# Altium PCB PCB_3U_RJ45.PCBDOC (part 1 of 2)
Units mil, origin at the board's own origin, x right, y up, seen from the top; angles counter-clockwise.
Board outline 2496.06 x 3937 mil, 4 copper layers (TopLayer, MidLayer2, Internal Plane 1, BottomLayer), stack 44.239 mil thick; 232 components, 140 nets, 824 pads, 257 vias.
Unrouted connection lines stored in the file: 421.
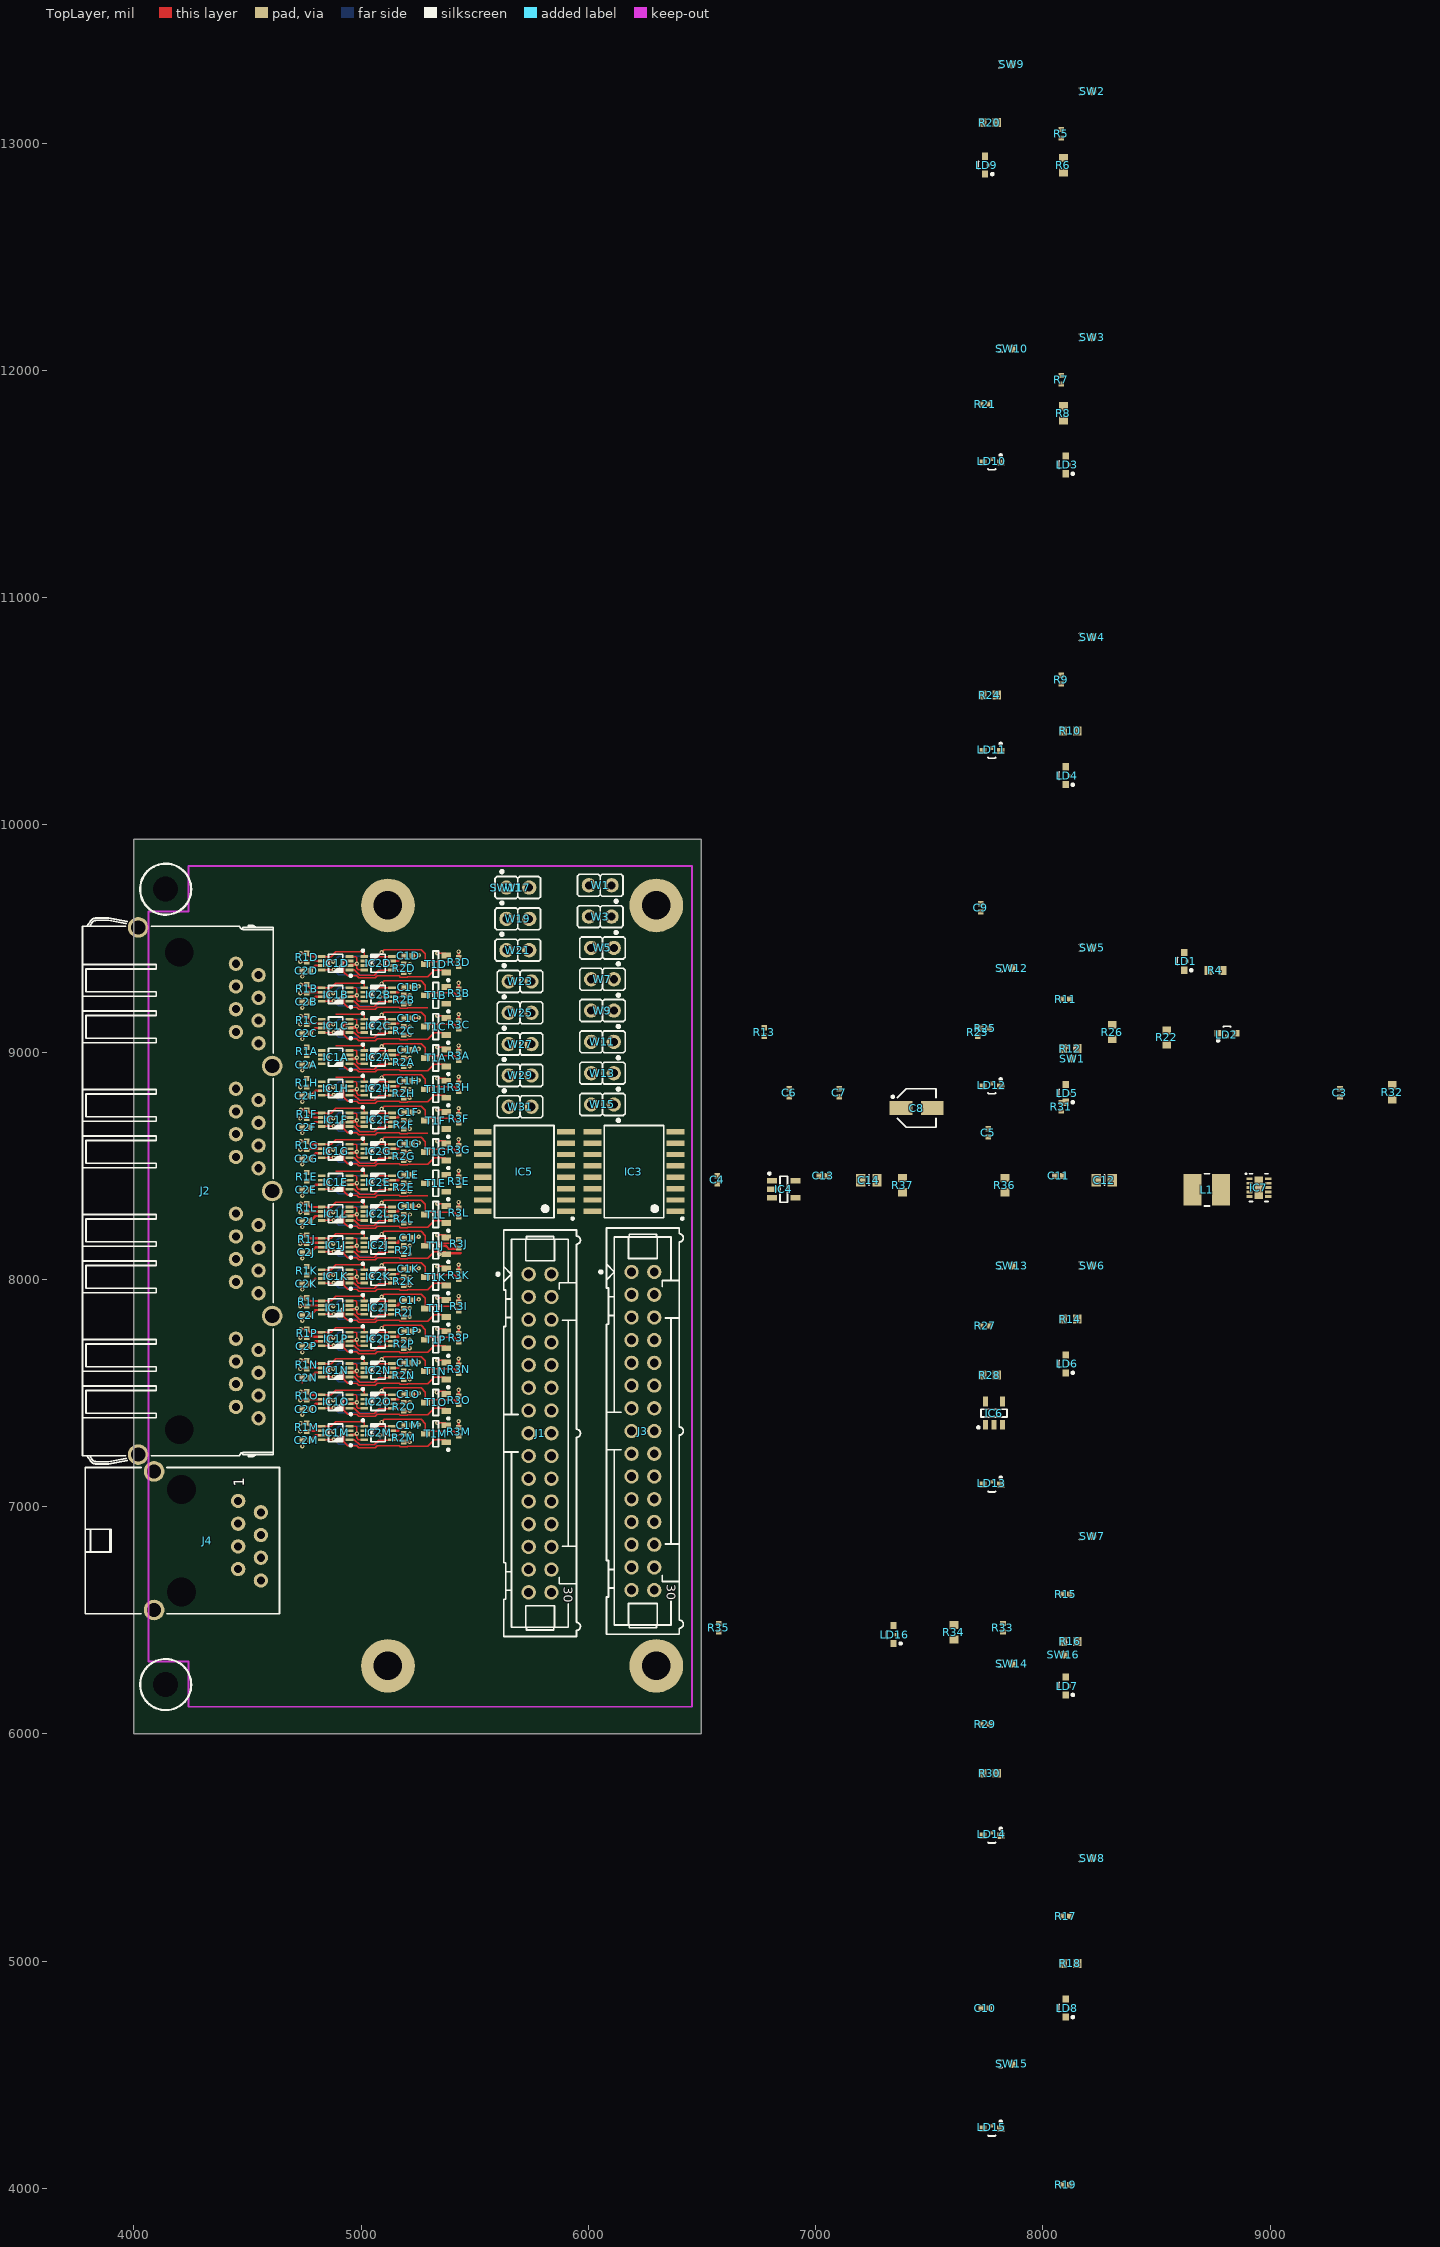
[diagram p0: TopLayer view]
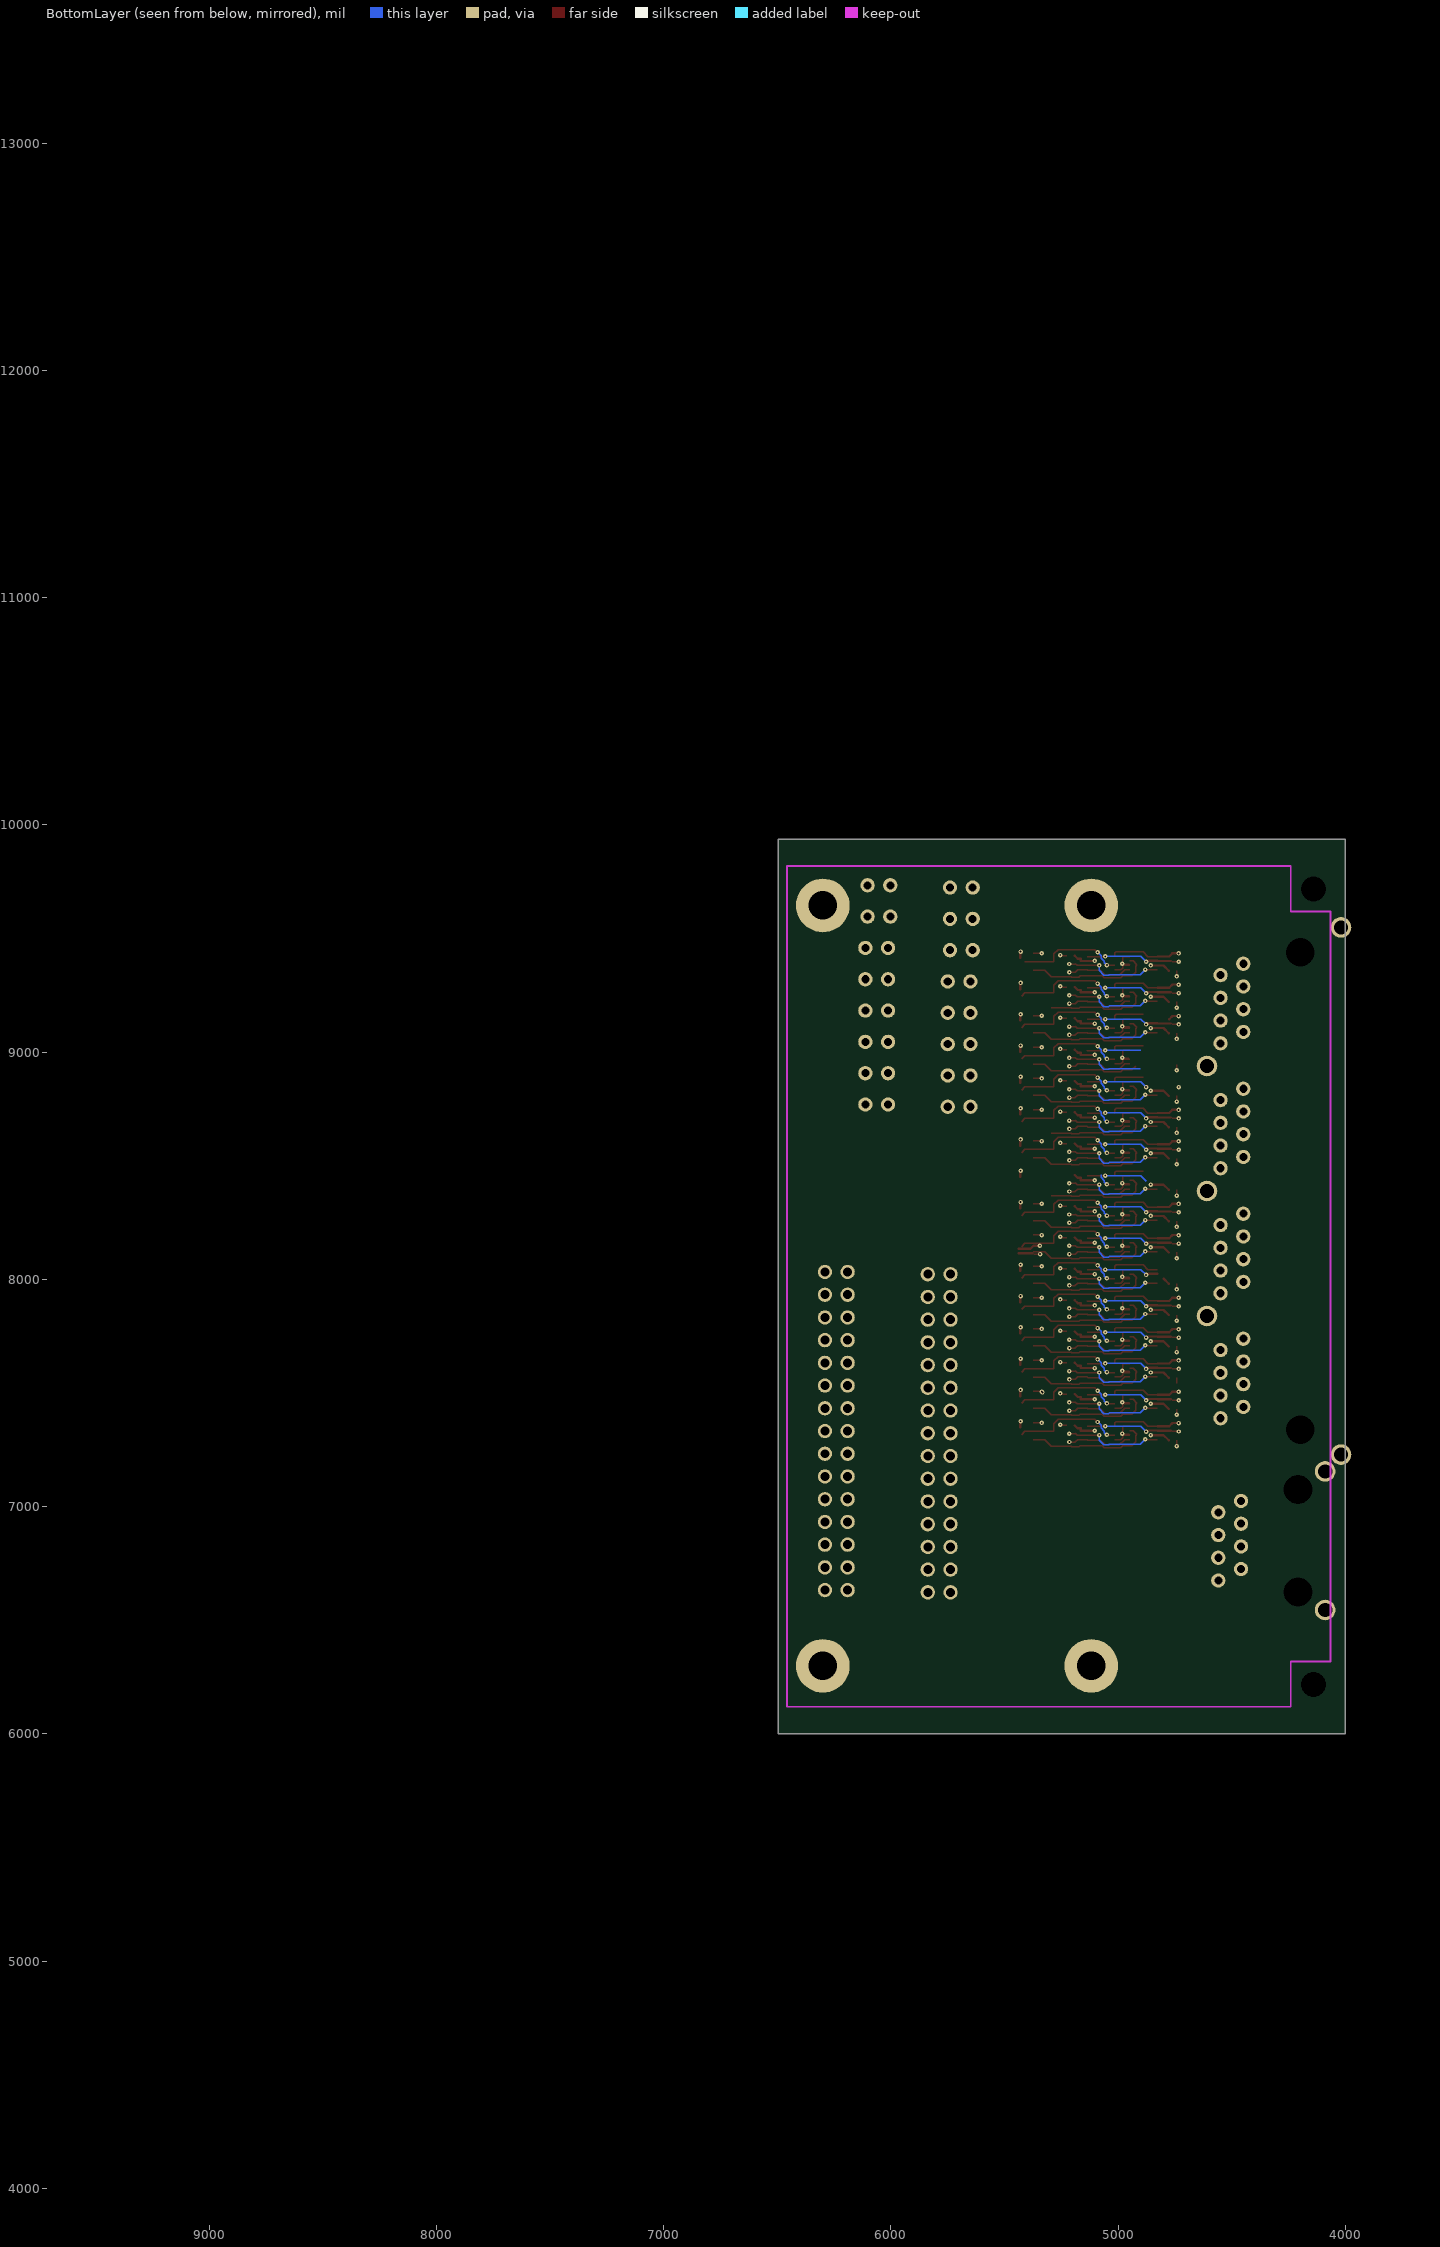
[diagram p1: BottomLayer view, seen from below]
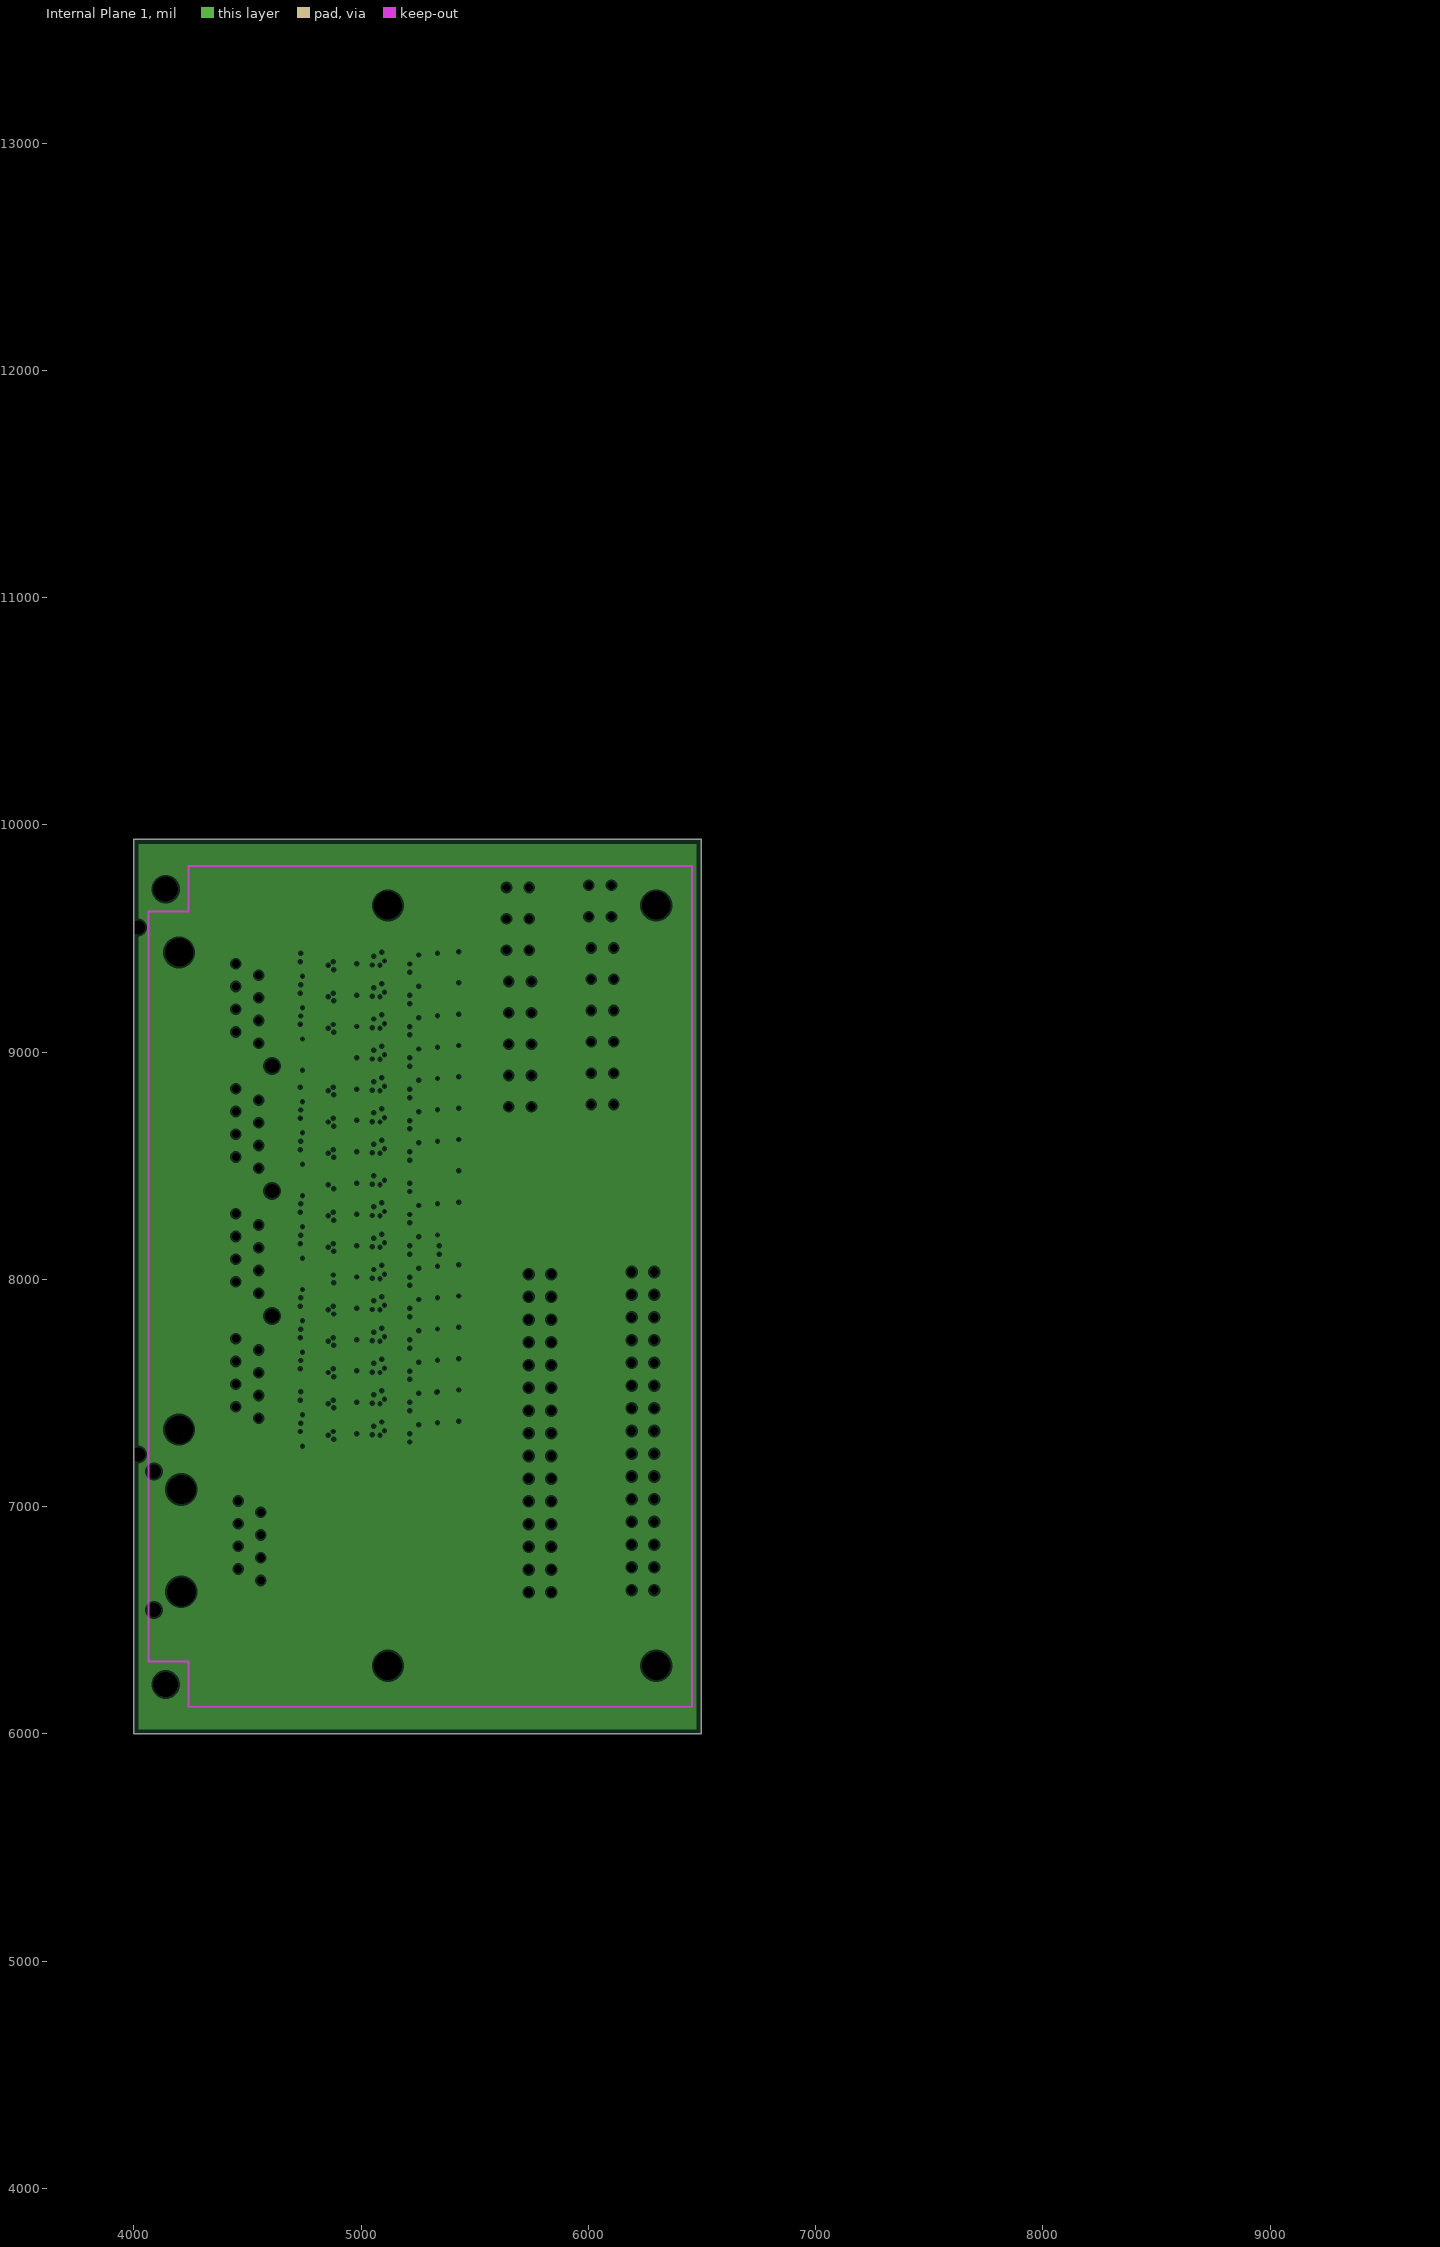
[diagram p2: Internal Plane 1, clearances drawn from the general rule]

## Layer stack, top to bottom
TopSolder: solder mask 0.4, Solder Resist, Dk 3.5
TopLayer: signal copper 1.4
Dielectric1: core 23.622, FR-4, Dk 4.8
MidLayer2: signal copper 1.4
Dielectric 3: prepreg 5, Dk 4.2
Internal Plane 1: plane copper 1.417
Dielectric2: core 10, FR-4, Dk 4.2
BottomLayer: signal copper 1.4
BottomSolder: solder mask 0.4, Solder Resist, Dk 3.5

## Board outline
4000,6000 6496.06,6000 6496.06,9937 4000,9937

## Design rules (kind name [scope] priority, off if disabled: settings)
AcuteAngle [All] p1: minimum=6.00000000000000E+0001 checktracksonly=FALSE
Clearance Clearance_poly [(InPolygon)] p1: gap=23.62
Clearance [All] p2: gap=6
DiffPairsRouting [All] p1: maxlimit=20 minlimit=15 mostfreqgap=17 toplayer_minwidth=15 toplayer_maxwidth=15 toplayer_prefwidth=15 midlayer2_minwidth=15 midlayer2_maxwidth=15 midlayer2_prefwidth=15 bottomlayer_minwidth=15 bottomlayer_maxwidth=15 bottomlayer_prefwidth=15 maxuncoupledlength=500
HoleSize [All] p1: absolutevalues=TRUE maxlimit=200 minlimit=1 maxpercent=80.000 minpercent=20.000
MinimumSolderMaskSliver [All] p1: minsoldermaskwidth=0
MinimumSolderMaskSliver SilkscreenOverComponentPads [All] p2: minsoldermaskwidth=10
PlaneClearance [All] p1: clearance=8
PlaneConnect PlaneConnect_pad [(InPadClass('All Pads'))] p1: planeconnectstyle=Relief reliefexpansion=20 reliefentries=4 reliefconductorwidth=10 reliefairgap=10
PlaneConnect [All] p2: planeconnectstyle=Direct reliefexpansion=20 reliefentries=4 reliefconductorwidth=10 reliefairgap=10
PolygonConnect PolygonConnect_pad [(InPadClass('All Pads'))] p1: connectstyle=Relief reliefconductorwidth=10 reliefentries=4 polygonreliefangle="90 Angle" airgapwidth=10
PolygonConnect [All] p2: connectstyle=Direct reliefconductorwidth=10 reliefentries=4 polygonreliefangle="90 Angle" airgapwidth=10
RoomDefinition U_LVDS_repeater16 [InComponentClass('U_LVDS_repeater16')] p1: confinementstyle=ConfineIn formatcopy=TRUE lockcomponents=FALSE outline 5466.54,7803.15 4718.5,7803.15 4718.5,7665.35 5466.54,7665.35
RoomDefinition U_LVDS_repeater15 [InComponentClass('U_LVDS_repeater15')] p2: confinementstyle=ConfineIn formatcopy=TRUE lockcomponents=FALSE outline 5466.54,7527.56 4718.5,7527.56 4718.5,7389.76 5466.54,7389.76
RoomDefinition U_LVDS_repeater14 [InComponentClass('U_LVDS_repeater14')] p3: confinementstyle=ConfineIn formatcopy=TRUE lockcomponents=FALSE outline 5466.54,7665.35 4718.5,7665.35 4718.5,7527.56 5466.54,7527.56
RoomDefinition U_LVDS_repeater13 [InComponentClass('U_LVDS_repeater13')] p4: confinementstyle=ConfineIn formatcopy=TRUE lockcomponents=FALSE outline 5466.54,7389.76 4718.5,7389.76 4718.5,7251.97 5466.54,7251.97
RoomDefinition U_LVDS_repeater12 [InComponentClass('U_LVDS_repeater12')] p5: confinementstyle=ConfineIn formatcopy=TRUE lockcomponents=FALSE outline 5466.54,8354.33 4718.5,8354.33 4718.5,8216.54 5466.54,8216.54
RoomDefinition U_LVDS_repeater11 [InComponentClass('U_LVDS_repeater11')] p6: confinementstyle=ConfineIn formatcopy=TRUE lockcomponents=FALSE outline 5466.54,8078.74 4718.5,8078.74 4718.5,7940.94 5466.54,7940.94
RoomDefinition U_LVDS_repeater10 [InComponentClass('U_LVDS_repeater10')] p7: confinementstyle=ConfineIn formatcopy=TRUE lockcomponents=FALSE outline 5466.54,8216.54 4718.5,8216.54 4718.5,8078.74 5466.54,8078.74
RoomDefinition U_LVDS_repeater9 [InComponentClass('U_LVDS_repeater9')] p8: confinementstyle=ConfineIn formatcopy=TRUE lockcomponents=FALSE outline 5466.54,7940.94 4718.5,7940.94 4718.5,7803.15 5466.54,7803.15
RoomDefinition U_LVDS_repeater8 [InComponentClass('U_LVDS_repeater8')] p9: confinementstyle=ConfineIn formatcopy=TRUE lockcomponents=FALSE outline 5466.54,8905.51 4718.5,8905.51 4718.5,8767.72 5466.54,8767.72
RoomDefinition U_LVDS_repeater7 [InComponentClass('U_LVDS_repeater7')] p10: confinementstyle=ConfineIn formatcopy=TRUE lockcomponents=FALSE outline 5466.54,8629.92 4718.5,8629.92 4718.5,8492.13 5466.54,8492.13
RoomDefinition U_LVDS_repeater6 [InComponentClass('U_LVDS_repeater6')] p11: confinementstyle=ConfineIn formatcopy=TRUE lockcomponents=FALSE outline 5466.54,8767.72 4718.5,8767.72 4718.5,8629.92 5466.54,8629.92
RoomDefinition U_LVDS_repeater5 [InComponentClass('U_LVDS_repeater5')] p12: confinementstyle=ConfineIn formatcopy=TRUE lockcomponents=FALSE outline 5466.54,8492.13 4718.5,8492.13 4718.5,8354.33 5466.54,8354.33
RoomDefinition U_LVDS_repeater4 [InComponentClass('U_LVDS_repeater4')] p13: confinementstyle=ConfineIn formatcopy=TRUE lockcomponents=FALSE outline 5466.54,9456.69 4718.5,9456.69 4718.5,9318.9 5466.54,9318.9
RoomDefinition U_LVDS_repeater3 [InComponentClass('U_LVDS_repeater3')] p14: confinementstyle=ConfineIn formatcopy=TRUE lockcomponents=FALSE outline 5466.54,9181.1 4718.5,9181.1 4718.5,9043.31 5466.54,9043.31
RoomDefinition U_LVDS_repeater2 [InComponentClass('U_LVDS_repeater2')] p15: confinementstyle=ConfineIn formatcopy=TRUE lockcomponents=FALSE outline 5466.54,9318.9 4718.5,9318.9 4718.5,9181.1 5466.54,9181.1
RoomDefinition U_LVDS_repeater1 [InComponentClass('U_LVDS_repeater1')] p16: confinementstyle=ConfineIn formatcopy=TRUE lockcomponents=FALSE outline 5466.54,9043.31 4718.5,9043.31 4718.5,8905.51 5466.54,8905.51
RoomDefinition PCB_3U_RJ45 [InComponentClass('PCB_3U_RJ45')] p17: confinementstyle=ConfineIn formatcopy=TRUE lockcomponents=FALSE outline 6541,6055 7775.59,6055 7775.59,8581 6541,8581
RoutingVias [All] p1: holewidth=7.87 width=19.68 viastyle="Through Hole" minholewidth=7.87 minwidth=19.68 maxholewidth=19.68 maxwidth=39.37
SilkToSilkClearance [All] p1: silktosilkclearance=0
SolderMaskExpansion [All] p1: expansion=4
ViasUnderSMD ViasUnderSMD_allow [InComponent('IC18') or InComponent('IC10') or InComponent('IC13') or InComponent('IC14') or InComponent('IC15')] p1: allowed=TRUE
ViasUnderSMD [All] p2: allowed=FALSE
Width Width_1 [(InDifferentialPairClass('All Differential Pairs'))] p1: maxlimit=8 minlimit=8 preferedwidth=8
Width [All] p2: maxlimit=100 minlimit=6 preferedwidth=10
24 further rules are at their usual default settings.

## Classes and differential pairs
component class PCB_3U_RJ45: C3 C4 C5 C6 C7 C8 C9 C10 C11 C12 C13 C14 IC3 IC4 IC5 IC6 IC7 J1 J2 J3 J4 L1 LD1 LD2 LD3 LD4 LD5 LD6 LD7 LD8 LD9 LD10 LD11 LD12 LD13 LD14 LD15 LD16 R4 R5 R6 R7 R8 R9 R10 R11 R12 R13 R14 R15 R16 R17 R18 R19 R20 R21 R22 R23 R24 R25 R26 R27 R28 R29 R30 R31 R32 R33 R34 R35 R36 R37 SW1 SW2 SW3 SW4 SW5 SW6 SW7 SW8 SW9 SW10 SW11 SW12 SW13 SW14 SW15 SW16 W1 W3 W5 W7 W9 W11 W13 W15 W17 W19 W21 W23 W25 W27 W29 W31
component class U_LVDS_repeater1: C1A C2A IC1A IC2A R1A R2A R3A T1A
component class U_LVDS_repeater2: C1B C2B IC1B IC2B R1B R2B R3B T1B
component class U_LVDS_repeater3: C1C C2C IC1C IC2C R1C R2C R3C T1C
component class U_LVDS_repeater4: C1D C2D IC1D IC2D R1D R2D R3D T1D
component class U_LVDS_repeater5: C1E C2E IC1E IC2E R1E R2E R3E T1E
component class U_LVDS_repeater6: C1F C2F IC1F IC2F R1F R2F R3F T1F
component class U_LVDS_repeater7: C1G C2G IC1G IC2G R1G R2G R3G T1G
component class U_LVDS_repeater8: C1H C2H IC1H IC2H R1H R2H R3H T1H
component class U_LVDS_repeater9: C1I C2I IC1I IC2I R1I R2I R3I T1I
component class U_LVDS_repeater10: C1J C2J IC1J IC2J R1J R2J R3J T1J
component class U_LVDS_repeater11: C1K C2K IC1K IC2K R1K R2K R3K T1K
component class U_LVDS_repeater12: C1L C2L IC1L IC2L R1L R2L R3L T1L
component class U_LVDS_repeater13: C1M C2M IC1M IC2M R1M R2M R3M T1M
component class U_LVDS_repeater14: C1N C2N IC1N IC2N R1N R2N R3N T1N
component class U_LVDS_repeater15: C1O C2O IC1O IC2O R1O R2O R3O T1O
component class U_LVDS_repeater16: C1P C2P IC1P IC2P R1P R2P R3P T1P
channel class LVDS_repeater: U_LVDS_repeater1 U_LVDS_repeater2 U_LVDS_repeater3 U_LVDS_repeater4 U_LVDS_repeater5 U_LVDS_repeater6 U_LVDS_repeater7 U_LVDS_repeater8 U_LVDS_repeater9 U_LVDS_repeater10 U_LVDS_repeater11 U_LVDS_repeater12 U_LVDS_repeater13 U_LVDS_repeater14 U_LVDS_repeater15 U_LVDS_repeater16

## Components (designator, comment, footprint, x,y, rotation, side; value= is the part's Value field where it differs from the comment)
C1A "100nF" CAPC1005X55N 5208.09,9011 r180 top (schematic designator C1)
C1B "100nF" CAPC1005X55N 5208.09,9286.59 r180 top (schematic designator C1)
C1C "100nF" CAPC1005X55N 5208.09,9148.8 r180 top (schematic designator C1)
C1D "100nF" CAPC1005X55N 5208.09,9424.39 r180 top (schematic designator C1)
C1E "100nF" CAPC1005X55N 5208.09,8459.82 r180 top (schematic designator C1)
C1F "100nF" CAPC1005X55N 5208.09,8735.41 r180 top (schematic designator C1)
C1G "100nF" CAPC1005X55N 5208.09,8597.61 r180 top (schematic designator C1)
C1H "100nF" CAPC1005X55N 5208.09,8873.2 r180 top (schematic designator C1)
C1I "100nF" CAPC1005X55N 5208.09,7908.64 r180 top (schematic designator C1)
C1J "100nF" CAPC1005X55N 5208.09,8184.23 r180 top (schematic designator C1)
C1K "100nF" CAPC1005X55N 5208.09,8046.43 r180 top (schematic designator C1)
C1L "100nF" CAPC1005X55N 5208.09,8322.02 r180 top (schematic designator C1)
C1M "100nF" CAPC1005X55N 5208.09,7357.46 r180 top (schematic designator C1)
C1N "100nF" CAPC1005X55N 5208.09,7633.05 r180 top (schematic designator C1)
C1O "100nF" CAPC1005X55N 5208.09,7495.25 r180 top (schematic designator C1)
C1P "100nF" CAPC1005X55N 5208.09,7770.84 r180 top (schematic designator C1)
C2A "100nF" CAPC1005X55N 4759.09,8945.16 r0 top (schematic designator C2)
C2B "100nF" CAPC1005X55N 4759.09,9220.75 r0 top (schematic designator C2)
C2C "100nF" CAPC1005X55N 4759.09,9082.95 r0 top (schematic designator C2)
C2D "100nF" CAPC1005X55N 4759.09,9358.54 r0 top (schematic designator C2)
C2E "100nF" CAPC1005X55N 4759.09,8393.98 r0 top (schematic designator C2)
C2F "100nF" CAPC1005X55N 4759.09,8669.57 r0 top (schematic designator C2)
C2G "100nF" CAPC1005X55N 4759.09,8531.77 r0 top (schematic designator C2)
C2H "100nF" CAPC1005X55N 4759.09,8807.36 r0 top (schematic designator C2)
C2I "100nF" CAPC1005X55N 4759.09,7842.8 r0 top (schematic designator C2)
C2J "100nF" CAPC1005X55N 4759.09,8118.39 r0 top (schematic designator C2)
C2K "100nF" CAPC1005X55N 4759.09,7980.59 r0 top (schematic designator C2)
C2L "100nF" CAPC1005X55N 4759.09,8256.18 r0 top (schematic designator C2)
C2M "100nF" CAPC1005X55N 4759.09,7291.61 r0 top (schematic designator C2)
C2N "100nF" CAPC1005X55N 4759.09,7567.2 r0 top (schematic designator C2)
C2O "100nF" CAPC1005X55N 4759.09,7429.41 r0 top (schematic designator C2)
C2P "100nF" CAPC1005X55N 4759.09,7705 r0 top (schematic designator C2)
C3 "100nF" CAPC1005X55N 9307.82,8821.86 r90 top
C4 "100nF" CAPC1005X55N 6567,8438 r90 top
C5 "100nF" CAPC1005X55N 7759.02,8644.69 r90 top
C6 "100nF" CAPC1005X55N 6883.82,8821.86 r90 top
C7 "100nF" CAPC1005X55N 7104.82,8821.86 r90 top
C8 "10uF" CAPAE430X540N 7444.82,8753.86 r0 top
C9 "100nF" CAPC1005X55N 7726.39,9635.8 r90 top
C10 "100nF" CAPC1005X55N 7746.08,4793.29 r180 top
C11 "100nF" CAPC1005X55N 8070,8455 r0 top
C12 "22uF" CAPC2012X135N 8271,8437 r0 top
C13 "100nF" CAPC1005X55N 7034,8455 r0 top
C14 "22uF" CAPC2012X135N 7235,8437 r0 top
IC1A "FIN1101K8X" SOP50P310X90-8N 4888.09,8978 r180 top (schematic designator IC1)
IC1B "FIN1101K8X" SOP50P310X90-8N 4888.09,9253.59 r180 top (schematic designator IC1)
IC1C "FIN1101K8X" SOP50P310X90-8N 4888.09,9115.8 r180 top (schematic designator IC1)
IC1D "FIN1101K8X" SOP50P310X90-8N 4888.09,9391.39 r180 top (schematic designator IC1)
IC1E "FIN1101K8X" SOP50P310X90-8N 4888.09,8426.82 r180 top (schematic designator IC1)
IC1F "FIN1101K8X" SOP50P310X90-8N 4888.09,8702.41 r180 top (schematic designator IC1)
IC1G "FIN1101K8X" SOP50P310X90-8N 4888.09,8564.61 r180 top (schematic designator IC1)
IC1H "FIN1101K8X" SOP50P310X90-8N 4888.09,8840.2 r180 top (schematic designator IC1)
IC1I "FIN1101K8X" SOP50P310X90-8N 4888.09,7875.64 r180 top (schematic designator IC1)
IC1J "FIN1101K8X" SOP50P310X90-8N 4888.09,8151.23 r180 top (schematic designator IC1)
IC1K "FIN1101K8X" SOP50P310X90-8N 4888.09,8013.43 r180 top (schematic designator IC1)
IC1L "FIN1101K8X" SOP50P310X90-8N 4888.09,8289.02 r180 top (schematic designator IC1)
IC1M "FIN1101K8X" SOP50P310X90-8N 4888.09,7324.46 r180 top (schematic designator IC1)
IC1N "FIN1101K8X" SOP50P310X90-8N 4888.09,7600.05 r180 top (schematic designator IC1)
IC1O "FIN1101K8X" SOP50P310X90-8N 4888.09,7462.25 r180 top (schematic designator IC1)
IC1P "FIN1101K8X" SOP50P310X90-8N 4888.09,7737.84 r180 top (schematic designator IC1)
IC2A "FIN1101K8X" SOP50P310X90-8N 5075.09,8978 r0 top (schematic designator IC2)
IC2B "FIN1101K8X" SOP50P310X90-8N 5075.09,9253.59 r0 top (schematic designator IC2)
IC2C "FIN1101K8X" SOP50P310X90-8N 5075.09,9115.8 r0 top (schematic designator IC2)
IC2D "FIN1101K8X" SOP50P310X90-8N 5075.09,9391.39 r0 top (schematic designator IC2)
IC2E "FIN1101K8X" SOP50P310X90-8N 5075.09,8426.82 r0 top (schematic designator IC2)
IC2F "FIN1101K8X" SOP50P310X90-8N 5075.09,8702.41 r0 top (schematic designator IC2)
IC2G "FIN1101K8X" SOP50P310X90-8N 5075.09,8564.61 r0 top (schematic designator IC2)
IC2H "FIN1101K8X" SOP50P310X90-8N 5075.09,8840.2 r0 top (schematic designator IC2)
IC2I "FIN1101K8X" SOP50P310X90-8N 5075.09,7875.64 r0 top (schematic designator IC2)
IC2J "FIN1101K8X" SOP50P310X90-8N 5075.09,8151.23 r0 top (schematic designator IC2)
IC2K "FIN1101K8X" SOP50P310X90-8N 5075.09,8013.43 r0 top (schematic designator IC2)
IC2L "FIN1101K8X" SOP50P310X90-8N 5075.09,8289.02 r0 top (schematic designator IC2)
IC2M "FIN1101K8X" SOP50P310X90-8N 5075.09,7324.46 r0 top (schematic designator IC2)
IC2N "FIN1101K8X" SOP50P310X90-8N 5075.09,7600.05 r0 top (schematic designator IC2)
IC2O "FIN1101K8X" SOP50P310X90-8N 5075.09,7462.25 r0 top (schematic designator IC2)
IC2P "FIN1101K8X" SOP50P310X90-8N 5075.09,7737.84 r0 top (schematic designator IC2)
IC3 "PCF8574ADW" SOIC127P1030X265-16N 6200.79,8474.41 r180 top
IC4 "24AA02E48T-I/OT" SOT95P280X145-5N 6860,8397 r0 top
IC5 "PCF8574ADW" SOIC127P1030X265-16N 5718.5,8474.41 r180 top
IC6 "24AA02E48T-I/OT" SOT95P280X145-5N 7785.45,7411.39 r90 top
IC7 "TPS62175DQC" SON50P200X300X80-11N-R94X250 8951,8404 r0 top
J1 "Familly" 3M_N2530-6002RB 5787.4,7322.83 r270 top
J2 "RJ45" TYCO_5406203-3 4499,8389 r90 top
J3 "Familly" 3M_N2530-6002RB 6240.16,7332.68 r270 top
J4 "RJ45" FCI_95678-001LF 4509,6850 r90 top
L1 "10uH" IND_MURATA-PS_8400 8722,8394 r0 top
LD1 "Red" LED_AVAGO_HSMC-C120 8622.05,9399.61 r90 top
LD2 "Red" LED_AVAGO_HSMC-C120 8810.48,9082.61 r0 top
LD3 "Red" LED_AVAGO_HSMC-C120 8100.41,11584.59 r90 top
LD4 "Red" LED_AVAGO_HSMC-C120 8100.41,10216.49 r90 top
LD5 "Red" LED_AVAGO_HSMC-C120 8100.41,8818.85 r90 top
LD6 "Red" LED_AVAGO_HSMC-C120 8100.41,7627.91 r90 top
LD7 "Red" LED_AVAGO_HSMC-C120 8100.41,6210.59 r90 top
LD8 "Red" LED_AVAGO_HSMC-C120 8100.41,4793.27 r90 top
LD9 "Red" LED_AVAGO_HSMC-C120 7746.08,12903.51 r90 top
LD10 "Red" LED_AVAGO_HSMC-C120 7775.6,11594.46 r180 top
LD11 "Red" LED_AVAGO_HSMC-C120 7775.6,10324.77 r180 top
LD12 "Red" LED_AVAGO_HSMC-C120 7775.6,8848.4 r180 top
LD13 "Red" LED_AVAGO_HSMC-C120 7775.6,7096.43 r180 top
LD14 "Red" LED_AVAGO_HSMC-C120 7775.6,5551.16 r180 top
LD15 "Red" LED_AVAGO_HSMC-C120 7775.6,4261.79 r180 top
LD16 "Red" LED_AVAGO_HSMC-C120 7342.51,6436.99 r90 top
R1A "100" RESC1005X40N 4761.09,9003.16 r270 top (schematic designator R1)
R1B "100" RESC1005X40N 4761.09,9278.75 r270 top (schematic designator R1)
R1C "100" RESC1005X40N 4761.09,9140.95 r270 top (schematic designator R1)
R1D "100" RESC1005X40N 4761.09,9416.54 r270 top (schematic designator R1)
R1E "100" RESC1005X40N 4761.09,8451.98 r270 top (schematic designator R1)
R1F "100" RESC1005X40N 4761.09,8727.57 r270 top (schematic designator R1)
R1G "100" RESC1005X40N 4761.09,8589.77 r270 top (schematic designator R1)
R1H "100" RESC1005X40N 4761.09,8865.36 r270 top (schematic designator R1)
R1I "100" RESC1005X40N 4761.09,7900.8 r270 top (schematic designator R1)
R1J "100" RESC1005X40N 4761.09,8176.39 r270 top (schematic designator R1)
R1K "100" RESC1005X40N 4761.09,8038.59 r270 top (schematic designator R1)
R1L "100" RESC1005X40N 4761.09,8314.18 r270 top (schematic designator R1)
R1M "100" RESC1005X40N 4761.09,7349.61 r270 top (schematic designator R1)
R1N "100" RESC1005X40N 4761.09,7625.2 r270 top (schematic designator R1)
R1O "100" RESC1005X40N 4761.09,7487.41 r270 top (schematic designator R1)
R1P "100" RESC1005X40N 4761.09,7763 r270 top (schematic designator R1)
R2A "100" RESC1005X40N 5188.09,8956 r270 top (schematic designator R2)
R2B "100" RESC1005X40N 5188.09,9231.59 r270 top (schematic designator R2)
R2C "100" RESC1005X40N 5188.09,9093.8 r270 top (schematic designator R2)
R2D "100" RESC1005X40N 5188.09,9369.39 r270 top (schematic designator R2)
R2E "100" RESC1005X40N 5188.09,8404.82 r270 top (schematic designator R2)
R2F "100" RESC1005X40N 5188.09,8680.41 r270 top (schematic designator R2)
R2G "100" RESC1005X40N 5188.09,8542.61 r270 top (schematic designator R2)
R2H "100" RESC1005X40N 5188.09,8818.2 r270 top (schematic designator R2)
R2I "100" RESC1005X40N 5188.09,7853.64 r270 top (schematic designator R2)
R2J "100" RESC1005X40N 5188.09,8129.23 r270 top (schematic designator R2)
R2K "100" RESC1005X40N 5188.09,7991.43 r270 top (schematic designator R2)
R2L "100" RESC1005X40N 5188.09,8267.02 r270 top (schematic designator R2)
R2M "100" RESC1005X40N 5188.09,7302.46 r270 top (schematic designator R2)
R2N "100" RESC1005X40N 5188.09,7578.05 r270 top (schematic designator R2)
R2O "100" RESC1005X40N 5188.09,7440.25 r270 top (schematic designator R2)
R2P "100" RESC1005X40N 5188.09,7715.84 r270 top (schematic designator R2)
R3A "10k" RESC1005X40N 5430.09,8983.16 r90 top (schematic designator R3)
R3B "10k" RESC1005X40N 5430.09,9258.75 r90 top (schematic designator R3)
R3C "10k" RESC1005X40N 5430.09,9120.95 r90 top (schematic designator R3)
R3D "10k" RESC1005X40N 5430.09,9396.54 r90 top (schematic designator R3)
R3E "10k" RESC1005X40N 5430.09,8431.98 r90 top (schematic designator R3)
R3F "10k" RESC1005X40N 5430.09,8707.57 r90 top (schematic designator R3)
R3G "10k" RESC1005X40N 5430.09,8569.77 r90 top (schematic designator R3)
R3H "10k" RESC1005X40N 5430.09,8845.36 r90 top (schematic designator R3)
R3I "10k" RESC1005X40N 5430.09,7880.8 r90 top (schematic designator R3)
R3J "10k" RESC1005X40N 5430.09,8156.39 r90 top (schematic designator R3)
R3K "10k" RESC1005X40N 5430.09,8018.59 r90 top (schematic designator R3)
R3L "10k" RESC1005X40N 5430.09,8294.18 r90 top (schematic designator R3)
R3M "10k" RESC1005X40N 5430.09,7329.61 r90 top (schematic designator R3)
R3N "10k" RESC1005X40N 5430.09,7605.2 r90 top (schematic designator R3)
R3O "10k" RESC1005X40N 5430.09,7467.41 r90 top (schematic designator R3)
R3P "10k" RESC1005X40N 5430.09,7743 r90 top (schematic designator R3)
R4 "220" RESC1608X55N 8759.84,9360.24 r0 top
R5 "10k" RESC1005X40N 8080.72,13041.28 r90 top
R6 "220" RESC1608X55N 8090.56,12903.49 r90 top
R7 "10k" RESC1005X40N 8080.72,11958.61 r90 top
R8 "220" RESC1608X55N 8090.56,11810.97 r90 top
R9 "10k" RESC1005X40N 8080.72,10639.71 r90 top
R10 "220" RESC1608X55N 8120.09,10413.34 r180 top
R11 "10k" RESC1005X40N 8100.41,9232.24 r180 top
R12 "220" RESC1608X55N 8120.09,9015.7 r180 top
R13 "10k" RESC1005X40N 6773.48,9088.61 r90 top
R14 "220" RESC1608X55N 8120.09,7824.76 r180 top
R15 "10k" RESC1005X40N 8100.41,6614.13 r180 top
R16 "220" RESC1608X55N 8120.09,6407.44 r180 top
R17 "10k" RESC1005X40N 8100.41,5196.81 r180 top
R18 "220" RESC1608X55N 8120.09,4990.12 r180 top
R19 "10k" RESC1005X40N 8100.41,4015.71 r180 top
R20 "220" RESC1608X55N 7765.76,13090.52 r180 top
R21 "10k" RESC1005X40N 7746.08,11850.36 r180 top
R22 "220" RESC1608X55N 8545.48,9064.61 r90 top
R23 "10k" RESC1005X40N 7714.48,9088.61 r90 top
R24 "220" RESC1608X55N 7765.76,10570.84 r180 top
R25 "10k" RESC1005X40N 7746.08,9104.3 r180 top
R26 "220" RESC1608X55N 8305.48,9088.61 r90 top
R27 "10k" RESC1005X40N 7746.08,7795.25 r180 top
R28 "220" RESC1608X55N 7765.76,7578.72 r180 top
R29 "10k" RESC1005X40N 7746.08,6043.29 r180 top
R30 "220" RESC1608X55N 7765.76,5826.75 r180 top
R31 "10k" RESC1005X40N 8080.71,8759.84 r90 top
R32 "220" RESC1608X55N 9537.82,8822.86 r90 top
R33 "10k" RESC1005X40N 7824.79,6466.52 r90 top
R34 "220" RESC1608X55N 7608.25,6446.84 r90 top
R35 "10k" RESC1005X40N 6574.79,6466.52 r90 top
R36 "270k" RESC1608X55N 7833,8415 r90 top
R37 "82k" RESC1608X55N 7383,8415 r90 top
SW1 "Jumper Type1" JUMPER_BLACK_INSULATED_2.54MM 8128.48,8971.61 r90 top
SW2 "Jumper Type1" JUMPER_BLACK_INSULATED_2.54MM 8218.52,13228.29 r180 top
SW3 "Jumper Type1" JUMPER_BLACK_INSULATED_2.54MM 8218.52,12145.62 r180 top
SW4 "Jumper Type1" JUMPER_BLACK_INSULATED_2.54MM 8218.52,10826.72 r180 top
SW5 "Jumper Type1" JUMPER_BLACK_INSULATED_2.54MM 8218.52,9458.61 r180 top
SW6 "Jumper Type1" JUMPER_BLACK_INSULATED_2.54MM 8218.52,8060.98 r180 top
SW7 "Jumper Type1" JUMPER_BLACK_INSULATED_2.54MM 8218.52,6870.04 r180 top
SW8 "Jumper Type1" JUMPER_BLACK_INSULATED_2.54MM 8218.52,5452.72 r180 top
SW9 "Jumper Type1" JUMPER_BLACK_INSULATED_2.54MM 7864.19,13346.42 r180 top
SW10 "Jumper Type1" JUMPER_BLACK_INSULATED_2.54MM 7864.19,12096.42 r180 top
SW11 "Jumper Type1" JUMPER_BLACK_INSULATED_2.54MM 5639.76,9724.41 r0 top
SW12 "Jumper Type1" JUMPER_BLACK_INSULATED_2.54MM 7864.19,9370.05 r180 top
SW13 "Jumper Type1" JUMPER_BLACK_INSULATED_2.54MM 7864.19,8061 r180 top
SW14 "Jumper Type1" JUMPER_BLACK_INSULATED_2.54MM 7864.19,6309.03 r180 top
SW15 "Jumper Type1" JUMPER_BLACK_INSULATED_2.54MM 7864.19,4547.23 r180 top
SW16 "Jumper Type1" JUMPER_BLACK_INSULATED_2.54MM 8090.53,6348.41 r90 top
T1A "BSS138LT1G" SOT95P240X110-3N 5328.74,8974.41 r180 top (schematic designator T1)
T1B "BSS138LT1G" SOT95P240X110-3N 5328.74,9250 r180 top (schematic designator T1)
T1C "BSS138LT1G" SOT95P240X110-3N 5328.74,9112.2 r180 top (schematic designator T1)
T1D "BSS138LT1G" SOT95P240X110-3N 5328.74,9387.8 r180 top (schematic designator T1)
T1E "BSS138LT1G" SOT95P240X110-3N 5328.74,8423.23 r180 top (schematic designator T1)
T1F "BSS138LT1G" SOT95P240X110-3N 5328.74,8698.82 r180 top (schematic designator T1)
T1G "BSS138LT1G" SOT95P240X110-3N 5328.74,8561.02 r180 top (schematic designator T1)
T1H "BSS138LT1G" SOT95P240X110-3N 5328.74,8836.61 r180 top (schematic designator T1)
T1I "BSS138LT1G" SOT95P240X110-3N 5328.74,7872.05 r180 top (schematic designator T1)
T1J "BSS138LT1G" SOT95P240X110-3N 5328.74,8147.64 r180 top (schematic designator T1)
T1K "BSS138LT1G" SOT95P240X110-3N 5328.74,8009.84 r180 top (schematic designator T1)
T1L "BSS138LT1G" SOT95P240X110-3N 5328.74,8285.43 r180 top (schematic designator T1)
T1M "BSS138LT1G" SOT95P240X110-3N 5328.74,7320.87 r180 top (schematic designator T1)
T1N "BSS138LT1G" SOT95P240X110-3N 5328.74,7596.46 r180 top (schematic designator T1)
T1O "BSS138LT1G" SOT95P240X110-3N 5328.74,7458.66 r180 top (schematic designator T1)
T1P "BSS138LT1G" SOT95P240X110-3N 5328.74,7734.25 r180 top (schematic designator T1)
W1 "Test Point" COMATEL_385.0358.1.02.400 6102.36,9734.25 r180 top
W3 "Test Point" COMATEL_385.0358.1.02.400 6102.36,9596.46 r180 top
W5 "Test Point" COMATEL_385.0358.1.02.400 6112.2,9458.66 r180 top
W7 "Test Point" COMATEL_385.0358.1.02.400 6112.2,9320.87 r180 top
W9 "Test Point" COMATEL_385.0358.1.02.400 6112.2,9183.07 r180 top
W11 "Test Point" COMATEL_385.0358.1.02.400 6112.2,9045.28 r180 top
W13 "Test Point" COMATEL_385.0358.1.02.400 6112.2,8907.48 r180 top
W15 "Test Point" COMATEL_385.0358.1.02.400 6112.2,8769.69 r180 top
W17 "Test Point" COMATEL_385.0358.1.02.400 5639.76,9724.41 r0 top
W19 "Test Point" COMATEL_385.0358.1.02.400 5639.76,9586.61 r0 top
W21 "Test Point" COMATEL_385.0358.1.02.400 5639.76,9448.82 r0 top
W23 "Test Point" COMATEL_385.0358.1.02.400 5649.61,9311.02 r0 top
W25 "Test Point" COMATEL_385.0358.1.02.400 5649.61,9173.23 r0 top
W27 "Test Point" COMATEL_385.0358.1.02.400 5649.61,9035.43 r0 top
W29 "Test Point" COMATEL_385.0358.1.02.400 5649.61,8897.64 r0 top
W31 "Test Point" COMATEL_385.0358.1.02.400 5649.61,8759.84 r0 top

## Footprints (in the part's own frame and the unit in brackets; to place one, negate y for a bottom-side part, rotate by r counter-clockwise, add the part's x,y. Pads: shape width x height; smd on the part's side, far side on the other; paste and mask are expansions set on the pad)
3M_N2530-6002RB [mm] "30 Contacts - Straight .100\" x .100\" Low Profile Four-Wall Header"
  round 1.6 hole 1: 1(-17.78,-1.27) 2(-17.78,1.27) 3(-15.24,-1.27) 4(-15.24,1.27) 5(-12.7,-1.27) 6(-12.7,1.27) 7(-10.16,-1.27) 8(-10.16,1.27) 9(-7.62,-1.27) 10(-7.62,1.27) 11(-5.08,-1.27) 12(-5.08,1.27) 13(-2.54,-1.27) 14(-2.54,1.27) 15(0,-1.27) 16(0,1.27) 17(2.54,-1.27) 18(2.54,1.27) 19(5.08,-1.27) 20(5.08,1.27) 21(7.62,-1.27) 22(7.62,1.27) 23(10.16,-1.27) 24(10.16,1.27) 25(12.7,-1.27) 26(12.7,1.27) 27(15.24,-1.27) 28(15.24,1.27) 29(17.78,-1.27) 30(17.78,1.27)
  silkscreen extent -22.71,-4.85 22.71,4.52, body extent -22.71,-4.11 22.71,4.52, height 9.91
CAPAE430X540N [mm] "Capacitor, Aluminium Electrolytric, 4.3mm L X 4.3mm W X 5.4mm H, IPC Medium Density"
  rect 2.55x1.6 smd: 1(-1.75,0) 2(1.75,0)
  silkscreen extent -2.8,-2.15 2.15,2.15, body extent -2.75,-2.25 2.75,2.25, height 5.7
CAPC1005X55N [mm] "Chip Capacitor, Body 1.0x0.55mm, IPC Medium Density"
  rect 0.62x0.62 smd: 1(-0.45,0) 2(0.45,0)
  body extent -0.52,-0.27 0.53,0.28, height 0.55
CAPC2012X135N [mm] "Chip Capacitor, Body 2.0x1.25mm, IPC Medium Density"
  rect 1.05x1.4 smd: 1(-0.9,0) 2(0.9,0)
  silkscreen extent 0,-0.58 0,0.58, body extent -1.05,-0.67 1.05,0.68, height 1.25
COMATEL_385.0358.1.02.400 [mm] "2 Contacts Straight Strip Header Pitch 2.54mm L=6.3mm ''Mini-Wire-Wrap''"
  round 1.6 hole 0.9: 1(0,0) 2(2.54,0)
  silkscreen extent -1.27,-1.23 3.81,1.93, body extent -1.27,-1.22 3.81,1.23, height 8
FCI_95678-001LF [mm] "1 Port, 8 Positions Shielded Snap PEG, CAT5 RJ45 Horizontal Modular Jack"
  round 1.6 hole 0.9: 1(4.445,1.27) 2(3.175,-1.27) 3(1.905,1.27) 4(0.635,-1.27) 5(-0.635,1.27) 6(-1.905,-1.27) 7(-3.171,1.27) 8(-4.445,-1.27)
  round 1 hole 3.25 unplated mask+1.1: M1(-5.715,7.62) M2(5.715,7.62)
  round 2.3 hole 1.6: SHIELD(-7.745,10.67) SHIELD(7.745,10.67)
  silkscreen extent -8.17,-3.35 8.17,18.35, body extent -8.17,-3.35 8.17,18.35, height 15.27
IND_MURATA-PS_8400 [mm] "Miniature Surface Mount Power Inductors, 4.5mm L X 3.3mm W X 2.9mm H, MURATA 8400 Serie"
  rect 2x3.5 smd: 1(-1.6,0) 2(1.6,0)
  silkscreen extent -0.3,-1.8 0.3,1.8, body extent -2.4,-1.8 2.4,1.8, height 2.9
JUMPER_BLACK_INSULATED_2.54MM [mm] "Black Insulated Jumper Pitch 2.54mm W=2.5mm L=5mm H=6.5mm"
  round 0.9 smd paste-0.46 mask-0.46: 1(0,0)
  silkscreen extent 1.1,-0.38 1.44,0.38, body extent -1.27,-1.27 3.73,1.23, height 8.2
LED_AVAGO_HSMC-C120 [mm] "Red Chip LED, 2-Leads, Body 1.7x1.1mm, Side Emitting Package"
  rect 0.8x0.7 smd: 1(-1,0) 2(1,0)
  rect 0.4x0.4 smd: 3(0,-0.35)
  silkscreen extent -1.12,-0.92 0.42,0.8, body extent -0.85,-0.3 0.85,0.8, height 0.7
RESC1005X40N [mm] "Chip Resistor, EIA 0402, Metric 1005, Body 1.0x0.5mm, IPC Medium Density"
  rect 0.58x0.62 smd: 1(-0.47,0) 2(0.47,0)
  body extent -0.52,-0.27 0.53,0.28, height 0.4
RESC1608X55N [mm] "Chip Resistor, EIA 0603, Metric 1608, Body 1.6x0.8mm, IPC Medium Density"
  rect 0.9x1 smd: 1(-0.8,0) 2(0.8,0)
  body extent -0.87,-0.47 0.88,0.48, height 0.55
SOIC127P1030X265-16N [mm] "SOIC 16, Pitch 1.27mm - Body 7.5x10.3mm, IPC Medium Density"
  rect 2x0.6 smd: 1(-4.65,4.445) 2(-4.65,3.175) 3(-4.65,1.905) 4(-4.65,0.635) 5(-4.65,-0.635) 6(-4.65,-1.905) 7(-4.65,-3.175) 8(-4.65,-4.445) 9(4.65,-4.445) 10(4.65,-3.175) 11(4.65,-1.905) 12(4.65,-0.635) 13(4.65,0.635) 14(4.65,1.905) 15(4.65,3.175) 16(4.65,4.445)
  silkscreen extent -5.53,-5.15 3.32,5.37, body extent -5.18,-5.25 5.18,5.25, height 1.68
SON50P200X300X80-11N-R94X250 [mm] "SON, 10-Leads, Body 2x3mm, Pitch 0.5mm, Thermal Pad 0.94x2.5mm, IPC Medium Density"
  rect 0.7x0.3 smd: 1(-1.05,1) 2(-1.05,0.5) 3(-1.05,0) 4(-1.05,-0.5) 5(-1.05,-1) 6(1.05,-1) 7(1.05,-0.5) 8(1.05,0) 9(1.05,0.5) 10(1.05,1)
  rect 0.94x2.5 smd: 11(0,0)
  silkscreen extent -1.5,-1.55 1.05,1.6, body extent -1.05,-1.55 1.05,1.55, height 0.8
SOP50P310X90-8N [mm] "SOP, 0.50mm pitch; 8 pin, 2.30mm W X 2.00mm L X 0.90mm H body, PC Medium Density"
  rect 0.85x0.3 smd: 1(-1.55,0.75) 2(-1.55,0.25) 3(-1.55,-0.25) 4(-1.55,-0.75) 5(1.55,-0.75) 6(1.55,-0.25) 7(1.55,0.25) 8(1.55,0.75)
  silkscreen extent -1.83,-1 0.8,1.52, body extent -1.62,-1 1.62,1, height 0.9
SOT95P240X110-3N [mm] "SOT23 3-Leads, Pitch 0.95mm, Body 1.3x2.9mm, IPC Medium Density"
  rect 1.05x0.65 smd: 1(-1.15,0.95) 2(-1.15,-0.95) 3(1.15,0)
  silkscreen extent -1.53,-1.45 0.3,1.92, body extent -1.25,-1.5 1.25,1.5, height 1.1
SOT95P280X145-5N [mm] "SOT, 0.95mm pitch; 5 pin, 1.60mm W X 2.90mm L X 1.45mm H body, IPC Medium Density"
  rect 1.1x0.6 smd: 1(-1.3,0.95) 2(-1.3,0) 3(-1.3,-0.95) 4(1.3,-0.95) 5(1.3,0.95)
  silkscreen extent -1.72,-1.45 0.43,1.87, body extent -1.4,-1.5 1.4,1.5, height 1.45
TYCO_5406203-3 [mm] "4 x RJ45 Jacks - 8 Positions"
  round 1.6 hole 0.9: 1A(-16.51,1.27) 1B(-2.54,1.27) 1C(11.43,1.27) 1D(25.4,1.27) 2A(-17.78,-1.27) 2B(-3.81,-1.27) 2C(10.16,-1.27) 2D(24.13,-1.27) 3A(-19.05,1.27) 3B(-5.08,1.27) 3C(8.89,1.27) 3D(22.86,1.27) 4A(-20.32,-1.27) 4B(-6.35,-1.27) 4C(7.62,-1.27) 4D(21.59,-1.27) 5A(-21.59,1.27) 5B(-7.62,1.27) 5C(6.35,1.27) 5D(20.32,1.27) 6A(-22.86,-1.27) 6B(-8.89,-1.27) 6C(5.08,-1.27) 6D(19.05,-1.27) 7A(-24.13,1.27) 7B(-10.16,1.27) 7C(3.81,1.27) 7D(17.78,1.27) 8A(-25.4,-1.27) 8B(-11.43,-1.27) 8C(2.54,-1.27) 8D(16.51,-1.27)
  round 1 hole 3.2 unplated mask+1.35: M1(26.67,7.62) M2(-26.67,7.62)
  round 2.3 hole 1.6: SH(-29.46,12.19) SH(-13.97,-2.792) SH(0,-2.792) SH(13.97,-2.792) SH(29.46,12.19)
  silkscreen extent -30.51,-2.92 30.51,18.42, body extent -30.51,-2.92 30.51,18.42, height 14.55

## Part data
C1A C1B C1C C1D C1E C1F C1G C1H C1I C1J C1K C1L C1M C1N C1O C1P C2A C2B C2C C2D C2E C2F C2G C2H C2I C2J C2K C2L C2M C2N C2O C2P C3 C4 C5 C6 C7 C9 C10 C11 C13: library part CC0402_100NF_16V_10%_X5R, "Non-polarised capacitor"
C8: library part CAE430-540_10UF_16V_20%, "Polarised capacitor"
C12 C14: library part CC0805_22UF_16V_10%_X5R, "Non-polarised capacitor"
IC1A IC1B IC1C IC1D IC1E IC1F IC1G IC1H IC1I IC1J IC1K IC1L IC1M IC1N IC1O IC1P IC2A IC2B IC2C IC2D IC2E IC2F IC2G IC2H IC2I IC2J IC2K IC2L IC2M IC2N IC2O IC2P: "LVDS Single Port High Speed Repeater"
IC3 IC5: "Remote 8-bit I/O Expander For I2C Bus"
IC4 IC6: "1.7V-5.5V, 2K I2C Serial EEPROM With EUI-48 Node Identity"
IC7: "4.75-28VDC to 1-6VDC, 500mA Step-Down Converter With Sleep Mode"
J1 J3: library part 3M_N2530-6002RB, "Connector 30 Male"
J2: library part TYCO_5406203-3, "Connector 4 x RJ45 + Shield"
J4: library part FCI_95678-001LF, "1 Port, 8 Positions Shielded Snap PEG, CAT5 RJ45 Horizontal Modular Jack"
L1: library part IND_10UH_10%_MURATA-PS_8400, "Inductor With Core"
LD1 LD2 LD3 LD4 LD5 LD6 LD7 LD8 LD9 LD10 LD11 LD12 LD13 LD14 LD15 LD16: library part LED_AVAGO_HSMC-C120, "LED Red 1C 2A"
R1A R1B R1C R1D R1E R1F R1G R1H R1I R1J R1K R1L R1M R1N R1O R1P R2A R2B R2C R2D R2E R2F R2G R2H R2I R2J R2K R2L R2M R2N R2O R2P: library part R0402_100R_1%_0.1W_100PPM, "Resistor - 1%"
R3A R3B R3C R3D R3E R3F R3G R3H R3I R3J R3K R3L R3M R3N R3O R3P R5 R7 R9 R11 R13 R15 R17 R19 R21 R23 R25 R27 R29 R31 R33 R35: library part R0402_10K_1%_0.0625W_100PPM, "Resistor - 1%"
R4 R6 R8 R10 R12 R14 R16 R18 R20 R22 R24 R26 R28 R30 R32 R34: library part R0603_220R_1%_0.1W_100PPM, "Resistor - 1%"
R36: library part R0603_270K_1%_0.1W_100PPM, "Resistor - 1%"
R37: library part R0603_82K_1%_0.1W_100PPM, "Resistor - 1%"
SW1 SW2 SW3 SW4 SW5 SW6 SW7 SW8 SW9 SW10 SW11 SW12 SW13 SW14 SW15 SW16: library part COMATEL_313.1730.0.00.40.0, "Jumper 1 Pin"
T1A T1B T1C T1D T1E T1F T1G T1H T1I T1J T1K T1L T1M T1N T1O T1P: "N-CHANNEL MOSFET WITH DIODE"
W1 W3 W5 W7 W9 W11 W13 W15 W17 W19 W21 W23 W25 W27 W29 W31: library part COMATEL_385.0358.1.02.400, "2 Mini Wire-Wrap Contact Strip Header"

## Free pads (board coordinates)
  round 236.22 hole 125.98: 0(6299.21,6299.21) 1(6299.21,9645.67) 2(5118.11,9645.67) 3(5118.11,6299.21)
  round 50 hole 110: 1(4140,9717) 2(4140,6217)

## Via types
v1: diameter 19.68, hole 7.87, TopLayer to BottomLayer, 257 vias

## Nets (pads, with @x,y where several pads share a name; then routed paths per layer and width w, separated by ;. In a path a pad name is that pad's centre, name@x,y a point inside that pad or via, vN(x,y) a via of type N, cw(c..) or ccw(c..) an arc to the next point about the centre after c; other vN are vias at no path point)
DIR1: IC1P.3 T1P.1 | length 553.1
  TopLayer w6: IC1P.3@4949.12,7747.69 4933.44,7747.69 4917.09,7731.34 4923.39,7725.05 4923.39,7698.68 4940.22,7681.84 4980.15,7681.84 4989,7673 5061.87,7673 5070.71,7681.84 5167.24,7681.84 5172.16,7676.92 5204.03,7676.92 5206.2,7679.09 5206.29,7679 5293.25,7679 5321.69,7707.44 T1P.1@5373.37,7707.44
DIR2: IC1O.3 T1O.1 | length 553.1
  TopLayer w6: IC1O.3@4949.12,7472.09 4933.44,7472.09 4917.09,7455.75 4923.39,7449.46 4923.39,7423.09 4940.22,7406.25 4980.15,7406.25 4989,7397.41 5061.87,7397.41 5070.71,7406.25 5167.24,7406.25 5172.16,7401.33 5204.03,7401.33 5206.2,7403.5 5206.29,7403.41 5293.25,7403.41 5321.69,7431.85 T1O.1@5373.37,7431.85
DIR3: IC1N.3 T1N.1 | length 553.1
  TopLayer w6: IC1N.3@4949.12,7609.89 4933.44,7609.89 4917.09,7593.55 4923.39,7587.26 4923.39,7560.89 4940.22,7544.05 4980.15,7544.05 4989,7535.2 5061.87,7535.2 5070.71,7544.05 5167.24,7544.05 5172.16,7539.13 5204.03,7539.13 5206.2,7541.3 5206.29,7541.2 5293.25,7541.2 5321.69,7569.65 T1N.1@5373.37,7569.65
DIR4: IC1M.3 T1M.1 | length 553.1
  TopLayer w6: IC1M.3@4949.12,7334.3 4933.44,7334.3 4917.09,7317.96 4923.39,7311.66 4923.39,7285.3 4940.22,7268.46 4980.15,7268.46 4989,7259.61 5061.87,7259.61 5070.71,7268.46 5167.24,7268.46 5172.16,7263.54 5204.03,7263.54 5206.2,7265.71 5206.29,7265.61 5293.25,7265.61 5321.69,7294.06 T1M.1@5373.37,7294.06
DIR5: IC1L.3 T1L.1 | length 553.1
  TopLayer w6: IC1L.3@4949.12,8298.87 4933.44,8298.87 4917.09,8282.52 4923.39,8276.23 4923.39,8249.86 4940.22,8233.02 4980.15,8233.02 4989,8224.18 5061.87,8224.18 5070.71,8233.02 5167.24,8233.02 5172.16,8228.1 5204.03,8228.1 5206.2,8230.27 5206.29,8230.18 5293.25,8230.18 5321.69,8258.62 T1L.1@5373.37,8258.62
DIR6: IC1K.3 T1K.1 | length 553.1
  TopLayer w6: IC1K.3@4949.12,8023.28 4933.44,8023.28 4917.09,8006.93 4923.39,8000.64 4923.39,7974.27 4940.22,7957.43 4980.15,7957.43 4989,7948.59 5061.87,7948.59 5070.71,7957.43 5167.24,7957.43 5172.16,7952.51 5204.03,7952.51 5206.2,7954.68 5206.29,7954.59 5293.25,7954.59 5321.69,7983.03 T1K.1@5373.37,7983.03
DIR7: IC1J.3 T1J.1 | length 962.7
  TopLayer w6: IC1J.3@4949.12,8161.07 4933.44,8161.07 4917.09,8144.73 4923.39,8138.44 4923.39,8112.07 4940.22,8095.23 4980.15,8095.23 4989,8086.39 5061.87,8086.39 5070.71,8095.23 5167.24,8095.23 5172.16,8090.31 5204.03,8090.31 5206.2,8092.48 5206.29,8092.39 5293.25,8092.39 5321.69,8120.83 T1J.1@5373.37,8120.83 ; v1(5056.09,8043.43) 5056.94,8042.59 5135.75,8042.59 5136.12,8042.96 ; v1(5343.09,8111.11) 5343.58,8111.61 T1J.1@5371.09,8111.61
  TopLayer w10: 4828.23,8024.43 4872.09,8024.43 v1(4877.09,8019.43) ; T1J.1@5377.74,8114.8 5437.06,8114.8 5438.22,8115.95
  BottomLayer w6: v1(4877.09,8019.43) 4901.09,8043.43 v1(5056.09,8043.43)
DIR8: IC1I.3 T1I.1 | length 553.1
  TopLayer w6: IC1I.3@4949.12,7885.48 4933.44,7885.48 4917.09,7869.14 4923.39,7862.85 4923.39,7836.48 4940.22,7819.64 4980.15,7819.64 4989,7810.8 5061.87,7810.8 5070.71,7819.64 5167.24,7819.64 5172.16,7814.72 5204.03,7814.72 5206.2,7816.89 5206.29,7816.8 5293.25,7816.8 5321.69,7845.24 T1I.1@5373.37,7845.24
DIR9: IC1H.3 T1H.1 | length 553.1
  TopLayer w6: IC1H.3@4949.12,8850.05 4933.44,8850.05 4917.09,8833.7 4923.39,8827.41 4923.39,8801.04 4940.22,8784.2 4980.15,8784.2 4989,8775.36 5061.87,8775.36 5070.71,8784.2 5167.24,8784.2 5172.16,8779.28 5204.03,8779.28 5206.2,8781.45 5206.29,8781.36 5293.25,8781.36 5321.69,8809.8 T1H.1@5373.37,8809.8
DIR10: IC1G.3 T1G.1 | length 553.1
  TopLayer w6: IC1G.3@4949.12,8574.46 4933.44,8574.46 4917.09,8558.11 4923.39,8551.82 4923.39,8525.45 4940.22,8508.61 4980.15,8508.61 4989,8499.77 5061.87,8499.77 5070.71,8508.61 5167.24,8508.61 5172.16,8503.69 5204.03,8503.69 5206.2,8505.86 5206.29,8505.77 5293.25,8505.77 5321.69,8534.21 T1G.1@5373.37,8534.21
DIR11: IC1F.3 T1F.1 | length 603.7
  TopLayer w6: 4889.09,8890.2 5009.09,8890.2 5014.07,8885.23 5014.07,8869.73 ; IC1F.3@4949.12,8712.25 4933.44,8712.25 4917.09,8695.91 4923.39,8689.62 4923.39,8663.25 4940.22,8646.41 4980.15,8646.41 4989,8637.57 5061.87,8637.57 5070.71,8646.41 5167.24,8646.41 5172.16,8641.49 5204.03,8641.49 5206.2,8643.66 5206.29,8643.57 5293.25,8643.57
DIR12: IC1E.3 T1E.1 | length 461.2
  TopLayer w6: IC1E.3@4949.12,8436.66 4933.44,8436.66 4917.09,8420.32 4923.39,8414.03 4923.39,8387.66 4940.22,8370.82 4980.15,8370.82 4989,8361.98 5061.87,8361.98 5070.71,8370.82 5167.24,8370.82 5172.16,8365.9 5204.03,8365.9 5206.2,8368.07 5206.29,8367.98 5293.25,8367.98
DIR13: IC1D.3 T1D.1 | length 553.1
  TopLayer w6: IC1D.3@4949.12,9401.23 4933.44,9401.23 4917.09,9384.89 4923.39,9378.59 4923.39,9352.22 4940.22,9335.39 4980.15,9335.39 4989,9326.54 5061.87,9326.54 5070.71,9335.39 5167.24,9335.39 5172.16,9330.46 5204.03,9330.46 5206.2,9332.64 5206.29,9332.54 5293.25,9332.54 5321.69,9360.98 T1D.1@5373.37,9360.98
DIR14: IC1C.3 T1C.1 | length 553.1
  TopLayer w6: IC1C.3@4949.12,9125.64 4933.44,9125.64 4917.09,9109.29 4923.39,9103 4923.39,9076.63 4940.22,9059.8 4980.15,9059.8 4989,9050.95 5061.87,9050.95 5070.71,9059.8 5167.24,9059.8 5172.16,9054.87 5204.03,9054.87 5206.2,9057.04 5206.29,9056.95 5293.25,9056.95 5321.69,9085.39 T1C.1@5373.37,9085.39
DIR15: IC1B.3 T1B.1 | length 730.1
  TopLayer w6: IC1B.3@4949.12,9263.43 4933.44,9263.43 4917.09,9247.09 4923.39,9240.8 4923.39,9214.43 4940.22,9197.59 4980.15,9197.59 4989,9188.75 5061.87,9188.75 5070.71,9197.59 5167.24,9197.59 5172.16,9192.67 5204.03,9192.67 5206.2,9194.84 5206.29,9194.75 5293.25,9194.75 ; v1(5056.09,8456.82) 5056.94,8455.98 5135.75,8455.98
  BottomLayer w6: 4877.09,8432.82 4901.09,8456.82 v1(5056.09,8456.82)
DIR16: IC1A.3 T1A.1 | length 479
  TopLayer w6: 4923.39,8938.84 4940.22,8922 4980.15,8922 4989,8913.16 5061.87,8913.16 5070.71,8922 5167.24,8922 5172.16,8917.08 5204.03,8917.08 5206.2,8919.25 5206.29,8919.16 5293.25,8919.16 5321.69,8947.6 T1A.1@5373.37,8947.6
DIR_CTRL1: IC3.4 R4.2 R5.1 SW1.1 W1.1
DIR_CTRL2: IC3.5 R6.2 R7.1 SW2.1 W3.1
DIR_CTRL3: IC3.6 R8.2 R9.1 SW3.1 W5.1
DIR_CTRL4: IC3.7 R10.2 R11.1 SW4.1 W7.1
DIR_CTRL5: IC3.9 R12.2 R13.1 SW5.1 W9.1
DIR_CTRL6: IC3.10 R14.2 R15.1 SW6.1 W11.1
DIR_CTRL7: IC3.11 R16.2 R17.1 SW7.1 W13.1
DIR_CTRL8: IC3.12 R18.2 R19.1 SW8.1 W15.1
DIR_CTRL9: IC5.4 R20.2 R21.1 SW9.1 W17.1
DIR_CTRL10: IC5.5 R22.2 R23.1 SW10.1 W19.1
DIR_CTRL11: IC5.6 R24.2 R25.1 SW11.1 W21.1
DIR_CTRL12: IC5.7 R26.2 R27.1 SW12.1 W23.1
DIR_CTRL13: IC5.9 R28.2 R29.1 SW13.1 W25.1
DIR_CTRL14: IC5.10 R30.2 R31.1 SW14.1 W27.1
DIR_CTRL15: IC5.11 R32.2 R33.1 SW15.1 W29.1
DIR_CTRL16: IC5.12 R34.2 R35.1 SW16.1 W31.1